# EAGLE board phonenet (EAGLE 6.5.0)
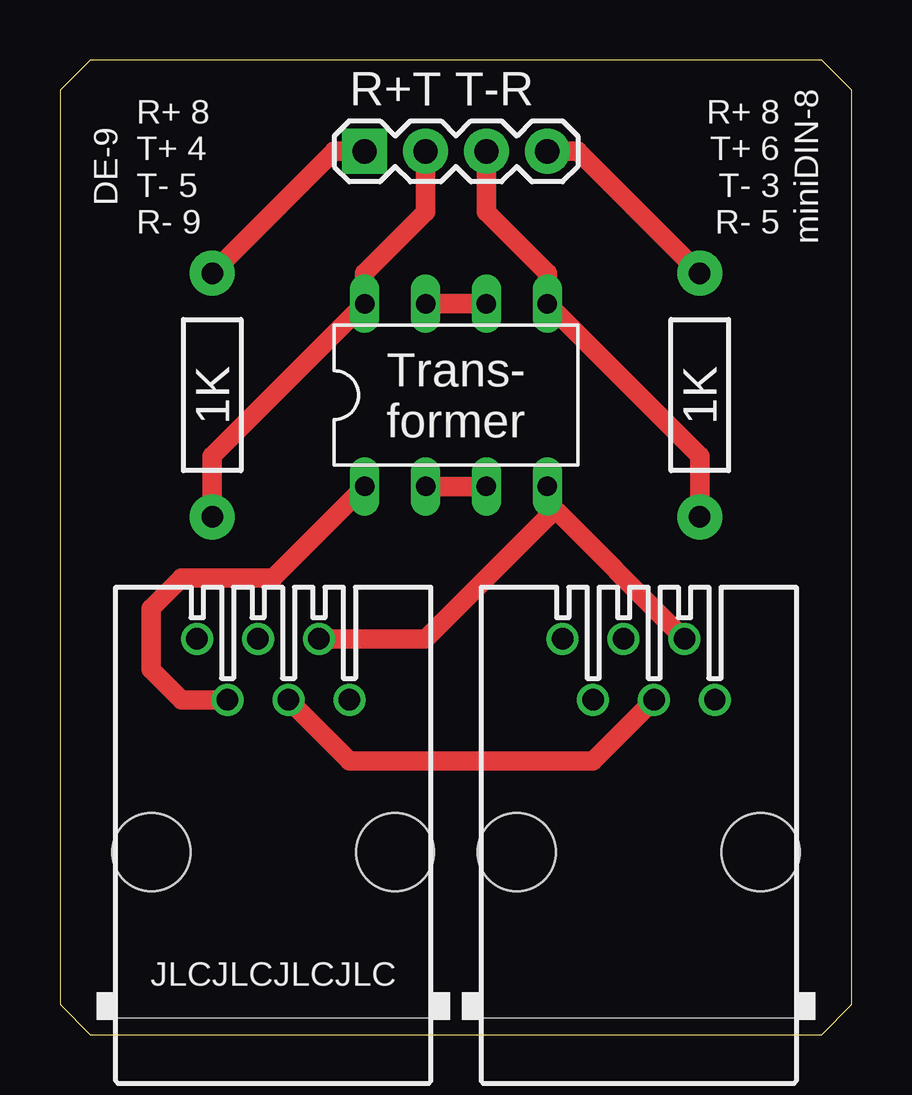
[diagram p0: board, top side]
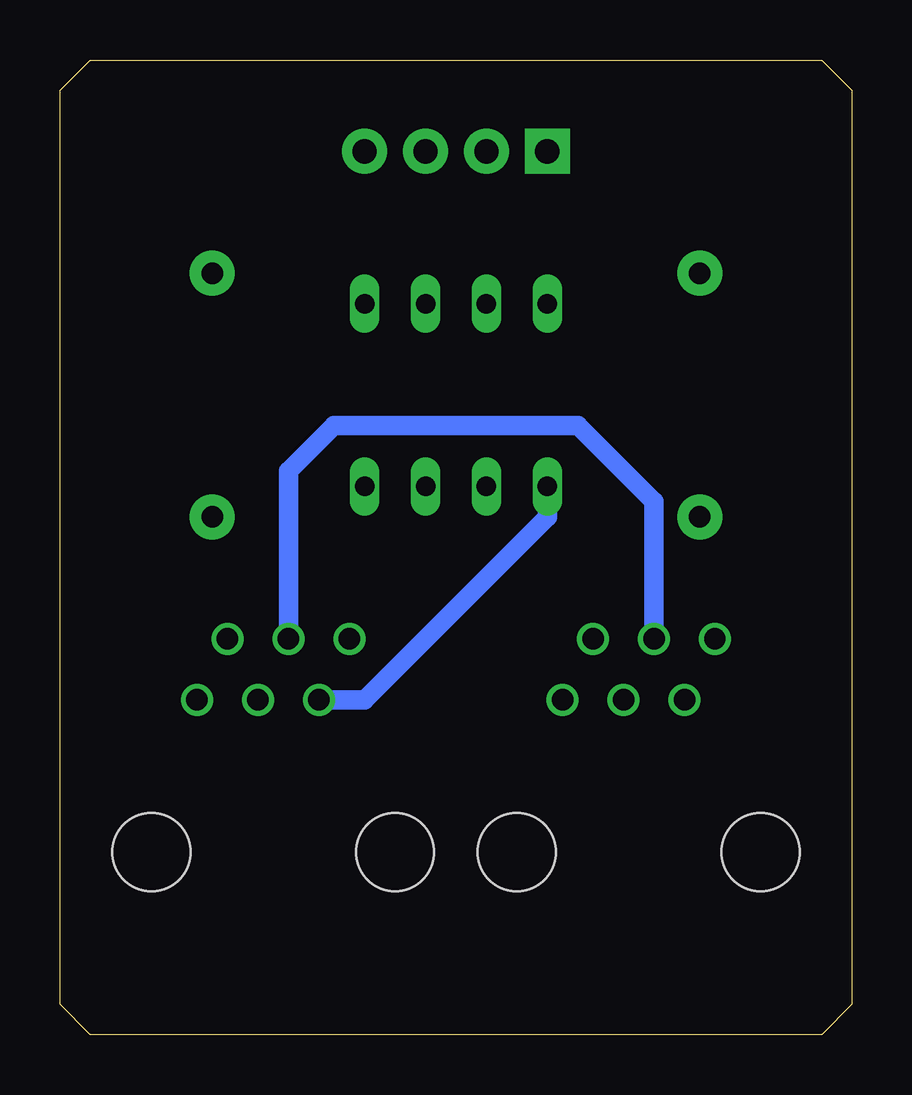
[diagram p1: board, bottom side, seen from below]

Size 33.02 x 40.64 mm. Coordinates in mm from the lower left corner, seen from the top.
Outline: 0,1.27 1.27,0 31.75,0 33.02,1.27 33.02,39.37 31.75,40.64 1.27,40.64 0,39.37 0,1.27
Copper layers (1*16): Top 0.0356mm / dielectric 1.5011mm / Bottom 0.0356mm
Design rules "LaenPCBOrder": minimum track width 6mil, minimum drill 13mil, track to track 6mil, track to pad 6mil, pad to pad 6mil, via to via 6mil, smd to smd 6mil, copper to edge 15mil, drill to drill 6mil, minimum pad ring 7mil, minimum via ring 7mil, stop-mask expansion 3mil, vias tented up to drill 0mil, thermal gap 10mil

## Footprints (pad centres in the part's own frame; a part is rotated, then mirrored left to right if it is on the bottom)
520250-3 = drill 0.889: 1 -3.175,8.89; 2 -1.905,6.35; 3 -0.635,8.89; 4 0.635,6.35; 5 1.905,8.89; 6 3.175,6.35 | hole 3.251: -5.08,0; 5.08,0
AXIAL-0.4 = drill 0.9 pad 1.88: P$1 -5.08,0; P$2 5.08,0
1X04 = drill 1.016 pad 1.88 square: 1 0,0 | drill 1.016 pad 1.88: 2 2.54,0; 3 5.08,0; 4 7.62,0
DIL08 = drill 0.813 long: 1 -3.81,-3.81; 2 -1.27,-3.81; 3 1.27,-3.81; 4 3.81,-3.81; 5 3.81,3.81; 6 1.27,3.81; 7 -1.27,3.81; 8 -3.81,3.81

## Placement (x,y rotation side)
E$1  [520250-3]  8.89,7.62 0 top
E$2  [520250-3]  24.13,7.62 0 top
E$3  [AXIAL-0.4]  6.35,26.67 90 top
E$4  [AXIAL-0.4]  26.67,26.67 90 top
E$5  [1X04]  12.7,36.83 0 top
E$20  [DIL08]  16.51,26.67 0 top

## Library data of the parts
E$1 E$2 = con-amp
E$3 E$4 = SparkFun-Passives
E$5 = SparkFun-Connectors
E$20 = ic-package

## Nets
S$1: E$1.5 E$2.5 E$20.4
S$2: E$1.3 E$2.3
S$3: E$1.2 E$2.2 E$20.1
S$4: E$1.4 E$2.4
S$5: E$20.6 E$20.7
S$6: E$4.P$1 E$5.3 E$20.5
S$7: E$3.P$1 E$5.2 E$20.8
S$8: E$3.P$2 E$5.1
S$9: E$4.P$2 E$5.4
S$15: E$20.2 E$20.3

## Tracks (layer width: path | path; a pad name or v marks a point on that pad's centre or on a via)
S$1
  Top 0.813: E$1.5 15.24,16.51 20.32,21.59 E$20.4 20.32,22.23 E$2.5
S$2
  Bottom 0.813: E$1.3 8.26,22.23 11.43,25.4 21.59,25.4 23.5,23.5 E$2.3
S$3
  Top 0.813: E$1.2 5.08,13.97 3.81,15.24 3.81,17.78 5.08,19.05 8.89,19.05 E$20.1
  Bottom 0.813: E$20.1 12.7,21.59 20.32,13.97 E$2.2
S$4
  Top 0.813: E$2.4 22.23,11.43 12.06,11.43 E$1.4
S$5
  Top 0.813: E$20.7 E$20.6
S$6
  Top 0.813: E$4.P$1 26.67,24.13 E$20.5 20.32,31.75 17.78,34.29 E$5.3
S$7
  Top 0.813: E$3.P$1 6.35,24.13 E$20.8 12.7,31.75 15.24,34.29 E$5.2
S$8
  Top 0.813: E$3.P$2 11.43,36.83 E$5.1
S$9
  Top 0.813: E$4.P$2 21.59,36.83 E$5.4
S$15
  Top 0.813: E$20.3 E$20.2

## Text on the board
tNames: R+T T-R | DE-9 | R+ 8 / T+ 4 / T- 5 / R- 9 | R+ 8 / T+ 6 / T- 3 / R- 5 | miniDIN-8 | 1K | Trans- / former | 1K | JLCJLCJLCJLC